# Altium PCB MS_1_MainBoard.PcbDoc
Units mm, origin at the board's own origin, x right, y up, seen from the top; angles counter-clockwise.
Board outline 92 x 68.8 mm, 2 copper layers (Top Layer, Bottom Layer), stack 1.621 mm thick; 80 components, 34 nets, 457 pads, 0 vias.
Unrouted connection lines stored in the file: 129.
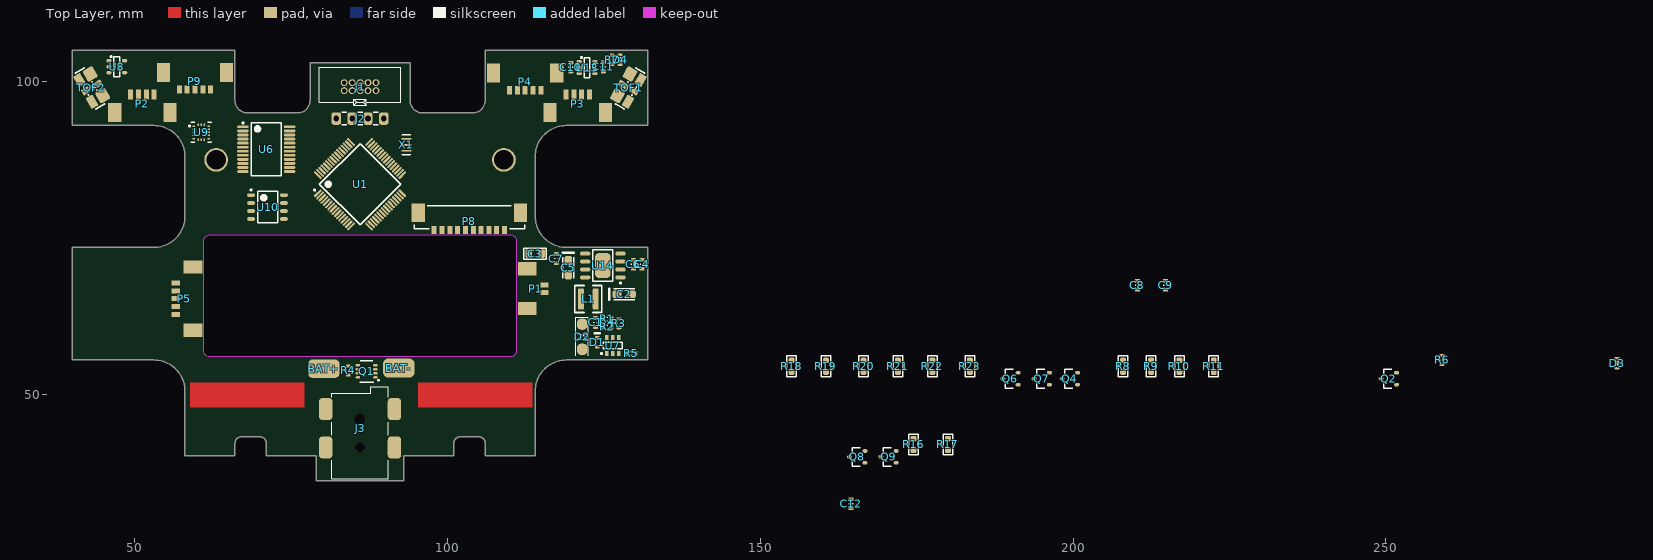
[diagram p0: Top Layer view]
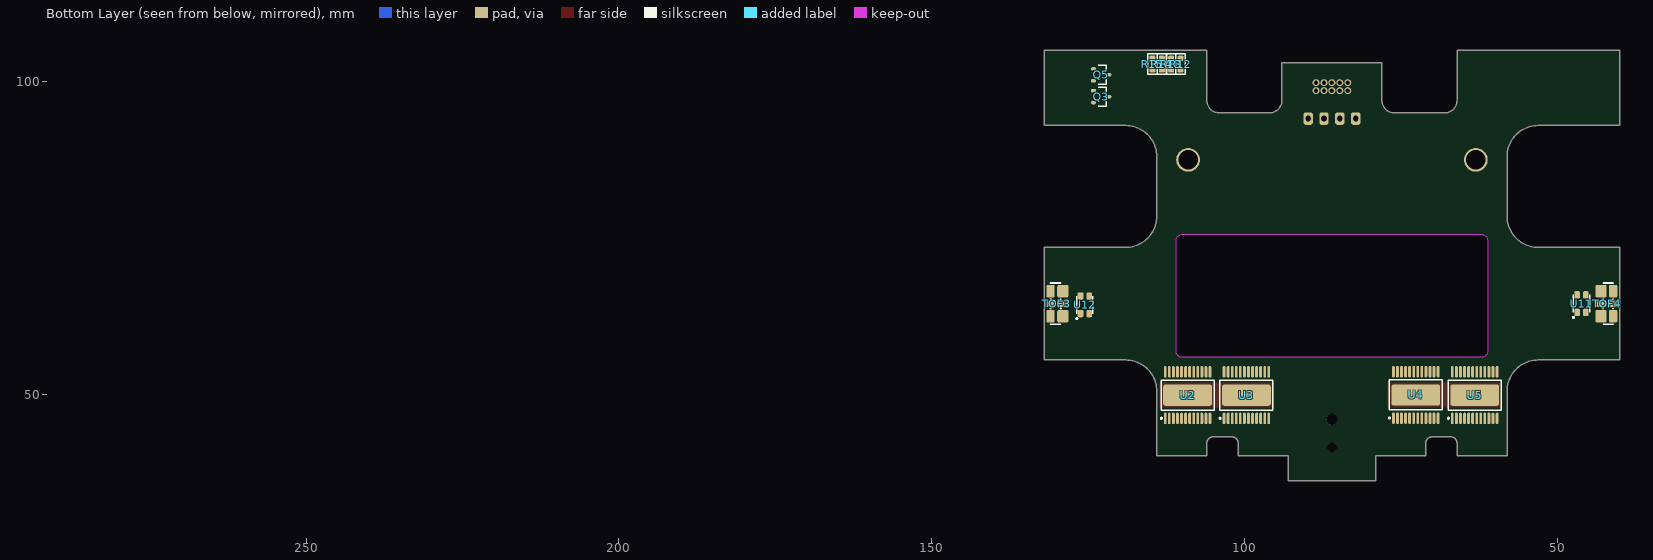
[diagram p1: Bottom Layer view, seen from below]

## Layer stack, top to bottom
Top Solder: solder mask 0.0102, Solder Resist, Dk 3.5
Top Layer: signal copper 0.0356
Dielectric 1: dielectric 1.55, FR-4, Dk 4.8
Bottom Layer: signal copper 0.0356
Bottom Solder: solder mask 0.0102, Solder Resist, Dk 3.5

## Board outline
40,55.5 53,55.5 cw(c53,50.5) 58,50.5 58,40.2 66,40.2 66,42.2 cw(c67,42.2) 67,43.2 70,43.2 cw(c70,42.2) 71,42.2 71,40.2 79,40.2 79,36.2 93,36.2 93,40.2 101,40.2 101,42.2 cw(c102,42.2) 102,43.2 105,43.2 cw(c105,42.2) 106,42.2 106,40.2 114,40.2 114,50.5 cw(c119,50.5) 119,55.5 132,55.5 132,73.5 119,73.5 cw(c119,78.5) 114,78.5 114,88 cw(c119,88) 119,93 132,93 132,105 106,105 106,97 cw(c104,97) 104,95 96,95 cw(c96,97) 94,97 94,103 78,103 78,97 cw(c76,97) 76,95 68,95 cw(c68,97) 66,97 66,105 40,105 40,93 53,93 cw(c53,88) 58,88 58,78.5 cw(c53,78.5) 53,73.5 40,73.5
cut-out: 62,75.5 110,75.5 cw(c110,74.5) 111,74.5 111,57 cw(c110,57) 110,56 62,56 cw(c62,57) 61,57 61,74.5 cw(c62,74.5)

## Design rules (kind name [scope] priority, off if disabled: settings)
BoardOutlineClearance [All] p1: gap=0.2 ignorepadtopadclearanceinfootprint=FALSE
Clearance Clearance_polygon [All vs InPolygon] p1: gap=0.4 ignorepadtopadclearanceinfootprint=FALSE
Clearance [All] p2: gap=0.155 ignorepadtopadclearanceinfootprint=FALSE
HoleSize [All] p1: absolutevalues=TRUE maxlimit=2.54 minlimit=0.3 maxpercent=80.000 minpercent=20.000
PasteMaskExpansion [All] p1: expansion=-0.05
PlaneClearance [All] p1: clearance=0.4
PlaneConnect [All] p1: pad.planeconnectstyle=Relief pad.reliefexpansion=0.508 pad.reliefentries=4 pad.reliefconductorwidth=0.254 pad.reliefairgap=0.155 via.planeconnectstyle=Direct via.reliefexpansion=0.508 via.reliefentries=4 via.reliefconductorwidth=0.254 via.reliefairgap=0.254
PolygonConnect [All] p1: thpad.connectstyle=Relief thpad.reliefconductorwidth=0.254 thpad.reliefentries=4 thpad.polygonreliefangle="90 Angle" thpad.airgapwidth=0.2 smdpad.connectstyle=Relief smdpad.reliefconductorwidth=0.254 smdpad.reliefentries=4 smdpad.polygonreliefangle="90 Angle" smdpad.airgapwidth=0.2 via.connectstyle=Direct via.reliefconductorwidth=0.254 via.reliefentries=4 via.polygonreliefangle="90 Angle" via.airgapwidth=0.254
RoutingVias [All] p1: holewidth=0.3 width=0.7 viastyle="Through Hole" minholewidth=0.3 minwidth=0.7 maxholewidth=0.5 maxwidth=1.1
RoutingVias RoutingVias_Power [InNetClass('Power')] p2: holewidth=0.4 width=0.8 viastyle="Through Hole" minholewidth=0.3 minwidth=0.7 maxholewidth=0.6 maxwidth=1.3
SolderMaskExpansion [All] p1: expansion=0.05
Width Width_Power [InNetClass('Power')] p1: maxlimit=1 minlimit=0.155 preferedwidth=0.4 minimp=50.000000 maximp=50.000000 favimp=50.000000
Width [All] p2: maxlimit=0.4 minlimit=0.155 preferedwidth=0.2 minimp=50.000000 maximp=50.000000 favimp=50.000000
26 further rules are at their usual default settings.

## Classes and differential pairs
component class Power: BAT+ BAT- C1 C2 C3 C4 C5 C6 C7 C12 D1 D2 L1 P1 Q1 R1 R2 R3 R4 R5 U7 U14
component class MotorsDrive: U2 U3 U4 U5
component class Main: J1 J2 J3 P2 P3 P4 P5 P8 P9 U1 U6 U9 U10 U11 U12 X1
component class Rangefinders: C8 C9 C10 C11 D3 D4 Q2 Q3 Q4 Q5 Q6 Q7 Q8 Q9 R6 R7 R8 R9 R10 R11 R12 R13 R14 R15 R16 R17 R18 R19 R20 R21 R22 R23 TOF1 TOF2 TOF3 TOF4 U8 U13

## Components (designator, comment, footprint, x,y, rotation, side; value= is the part's Value field where it differs from the comment)
BAT+ "1x2mm" "PAD 1x2mm" 80.2,54.1 r180 top value=NA
BAT- "1x2mm" "PAD 1x2mm" 92.2,54.2 r180 top value=NA
C1 "10n" C_0603_AUTO 123.65,61.5 r270 top
C2 "47uF 6.3V" Kemet_1206 125.85,65.1 r0 top
C3 "10u" C_0805_HAND 114,72.5 r180 top
C4 "1n" C_0603_AUTO 131.1,70.8 r90 top
C5 "47uF 6.3V" Kemet_1206 118.4,72.625 r270 top
C6 "100n" C_0603_AUTO 129.7,70.8 r90 top
C7 "100n" C_0603_AUTO 117.4,71.7 r90 top
C8 "100n" C_0603_AUTO 210.3,67.45 r90 top
C9 "100n" C_0603_AUTO 214.8,67.45 r90 top
C10 "100n" C_0603_AUTO 119.7,102.3 r90 top
C11 "100n" C_0603_AUTO 124.9,102.35 r90 top
C12 "10n" C_0603_AUTO 164.5,32.5 r90 top
D1 "1N4148WT-7" DIOD-SOD523-2_V 123.9,58.3 r90 top
D2 "STPS2L30A" SMA 121.52,56.2 r90 top value=NA
D3 "Red 0603" LED_0603_AUTO 286.999,55 r90 top value=Red
D4 "Red 0603" LED_0603_AUTO 127.6,103.5 r90 top value=Red
J1 "SHF-105-01-L-D-TH" SHF-105-01-L-D-TH 86,99.2 r0 top locked value=NA
J2 "Header 4x1" F_4X1_254 86,94.1 r90 top locked value=NA
J3 "694106106102" WE_694106106102 86,41.5 r90 top value=NA
L1 "4.7uH 5.1A" XAL4030 122.5,65.25 r0 top
P1 "53398-0271" MOLX-53398-0271_V 114.1,66.9 r270 top
P2 "53261-0471" MOLEX-53261-0471_V 51.2,96.5 r0 top
P3 "53261-0471" MOLEX-53261-0471_V 120.8,96.5 r0 top
P4 "53398-0571" MOLX-53398-0571-5_V 112.4,100 r180 top
P5 "53398-0571" MOLX-53398-0571-5_V 57.9,65.3 r90 top
P8 "53398-1071" MOLX-53398-1071_V 103.475,78.05 r0 top
P9 "53398-0571" MOLX-53398-0571-5_V 59.6,100.1 r180 top
Q1 "CSD16406Q3" SON8 87.05,53.675 r180 top value=NA
Q2 "2N7002BK" SOT23-3_AUTO 250.499,52.5 r90 top value=NA
Q3 "2N7002BK" SOT23-3_AUTO 122.9,97.6 r270 bottom value=NA
Q4 "2N7002BK" SOT23-3_AUTO 199.5,52.5 r90 top value=NA
Q5 "2N7002BK" SOT23-3_AUTO 122.9,101.1 r270 bottom value=NA
Q6 "2N7002BK" SOT23-3_AUTO 190,52.5 r90 top value=NA
Q7 "2N7002BK" SOT23-3_AUTO 195,52.5 r90 top value=NA
Q8 "2N7002BK" SOT23-3_AUTO 165.5,40 r90 top value=NA
Q9 "2N7002BK" SOT23-3_AUTO 170.5,40 r90 top value=NA
R1 "100k 1%" R_0603_AUTO 125.541,62.075 r0 top
R2 "47k 1%" R_0603_AUTO 125.541,60.775 r180 top
R3 "47k 1%" R_0603_AUTO 127.4,61.35 r90 top
R4 "100k 1%" R_0603_AUTO 84.1,53.825 r270 top
R5 "47k 1%" R_0603_AUTO 129.398,56.544 r180 top
R6 "680R 1%" R_0603_AUTO 258.999,55.5 r90 top
R7 "680R 1%" R_0603_AUTO 126.3,103.5 r270 top
R8 "2k2 1%" R_0603_HAND 208,54.5 r90 top
R9 "2k2 1%" R_0603_HAND 212.5,54.5 r90 top
R10 "47k 1%" R_0603_HAND 217,54.5 r90 top
R11 "47k 1%" R_0603_HAND 222.5,54.5 r90 top
R12 "2k2 1%" R_0603_HAND 110.2,102.8 r90 bottom
R13 "2k2 1%" R_0603_HAND 111.7,102.8 r90 bottom
R14 "47k 1%" R_0603_HAND 113.2,102.8 r90 bottom
R15 "47k 1%" R_0603_HAND 114.7,102.8 r90 bottom
R16 "2k2 1%" R_0603_HAND 174.5,42 r90 top
R17 "2k2 1%" R_0603_HAND 180,42 r90 top
R18 "47k 1%" R_0603_HAND 155,54.5 r90 top
R19 "47k 1%" R_0603_HAND 160.5,54.5 r90 top
R20 "2k2 1%" R_0603_HAND 166.5,54.5 r90 top
R21 "2k2 1%" R_0603_HAND 172,54.5 r90 top
R22 "47k 1%" R_0603_HAND 177.5,54.5 r90 top
R23 "47k 1%" R_0603_HAND 183.5,54.5 r90 top
TOF1 "VL53L0X carrier module" VL53L0X_module 129,99 r60 top locked value=NA
TOF2 "VL53L0X carrier module" VL53L0X_module 43,99 r300 top locked value=NA
TOF3 "VL53L0X carrier module" VL53L0X_module 130,64.5 r270 bottom locked value=NA
TOF4 "VL53L0X carrier module" VL53L0X_module 42,64.5 r90 bottom locked value=NA
U1 "STM32F722RET6" LQFP_64_HAND 86,83.6 r45 top value=NA
U2 "DRV8873S" SSOP24-TH_HAND 109.075,49.875 r90 bottom value=NA
U3 "DRV8873S" SSOP24-TH_HAND 99.675,49.875 r90 bottom value=NA
U4 "DRV8873S" SSOP24-TH_HAND 72.6,49.9 r90 bottom value=NA
U5 "DRV8873S" SSOP24-TH_HAND 63.175,49.875 r90 bottom value=NA
U6 "MCP23018-E/SS" SSOP-24_HAND 71,89.2 r0 top value=NA
U7 "LM2734YQMKE/NOPB" DDC0006A_L 126.4,57.8 r90 top
U8 "NCP114ASN280T1G" TSOP-5_AUTO 47.1,102.4 r0 top value=NA
U9 "LIS3DSH" LGA16_AUTO 60.6,91.9 r0 top value=NA
U10 "M24256-BRMN6" SOIC_8_AUTO 71.2,79.95 r0 top value=256kb
U11 "ASMB-MTB1-0A3A2" PLCC4 46.1,64.5 r180 bottom value=NA
U12 "ASMB-MTB1-0A3A2" PLCC4 125.506,64.325 r180 bottom value=NA
U13 "NCP114ASN280T1G" TSOP-5_AUTO 122.3,102.25 r0 top value=NA
U14 "ADP1706ARDZ-3.3-R7" SOIC-8_HAND_THERM 124.816,70.6 r180 top value=NA
X1 "CSTNE16M0V53C000R0" Murata_CSTCE 93.4,89.9 r90 top value=16MHz

## Footprints (in the part's own frame and the unit in brackets; to place one, negate y for a bottom-side part, rotate by r counter-clockwise, add the part's x,y. Pads: shape width x height; smd on the part's side, far side on the other; paste and mask are expansions set on the pad)
C_0603_AUTO [mm] "Metric_1608 Automatic soldering"
  rrect50% 0.6x0.8 smd: 1(-0.725,0) 2(0.725,0)
  silkscreen extent -0.05,-0.3 0.05,0.3, body extent -0.8,-0.43 0.8,0.43, height 0.6
C_0805_HAND [mm] "Metric_2012 Hand soldering"
  rrect50% 1.1x1.35 smd: 1(-1.025,0) 2(1.025,0)
  silkscreen extent -1.8,-0.9 1.8,0.9, body extent -1,-0.63 1,0.63, height 0.45
DDC0006A_L [mm] "SOT23, 6-Leads, Body 3.05x1.75mm, Pitch 0.95mm, IPC High Density"
  rrect18% 0.8x0.55 smd: 1(-1.275,0.95) 2(-1.275,0) 3(-1.275,-0.95) 4(1.275,-0.95) 5(1.275,0) 6(1.275,0.95)
  silkscreen extent -1.4,-1.55 0.5,1.9, body extent -1.43,-1.48 1.43,1.49, height 0.9
DIOD-SOD523-2_V [mm] "SOD523, 2-Leads, Body 1.2x0.8mm"
  rect 0.6x0.7 smd: 1(-0.7,0) 2(0.7,0)
  silkscreen extent 1.5,-0.4 1.5,0.4, body extent -0.8,-0.4 0.8,0.4, height 0.65
F_4X1_254 [mm] "Basic 4x1 female header"
  rrect50% 2x1.5 hole 0.9: 1(0,-3.81) 2(0,-1.27) 3(0,1.27) 4(0,3.81)
  silkscreen extent -1.02,-2.94 1.02,2.94, body extent -1.23,-5.08 1.27,5.08, height 8.4
Kemet_1206 [mm] "Tantalum Kemet 1206"
  rrect50% 1.45x1.15 smd: 1(1.225,0.9) 2(3.525,0.9)
  silkscreen extent 0,0 4.07,1.8, body extent 0.67,-0.01 4.07,1.79, height 1.78
LED_0603_AUTO [mm] "Cathode-1 Anode-2"
  rrect80% 0.4x0.8 smd: 1(-0.8,0) 2(0.8,0)
  silkscreen extent -0.3,-0.3 0.3,0.3, body extent -0.8,-0.4 0.8,0.4, height 0.7
LGA16_AUTO [mm] "pitch 0.5mm, 3x5 pins, body 3x3mm according to ST acc specs"
  oval 0.45x0.25 smd: 1(-1.2,1) 2(-1.2,0.5) 3(-1.2,0) 4(-1.2,-0.5) 5(-1.2,-1) 9(1.2,-1) 10(1.2,-0.5) 11(1.2,0) 12(1.2,0.5) 13(1.2,1)
  oval 0.25x0.45 smd: 6(-0.5,-1.2) 7(0,-1.2) 8(0.5,-1.2) 14(0.5,1.2) 15(0,1.2) 16(-0.5,1.2)
  silkscreen extent -2.02,-1.58 1.58,1.58, body extent -1.58,-1.58 1.58,1.58, height 1
LQFP_64_HAND [mm] "Hand soldering"
  rrect100% 1.6x0.35 smd: 1(-5.8,3.75) 2(-5.8,3.25) 3(-5.8,2.75) 4(-5.8,2.25) 5(-5.8,1.75) 6(-5.8,1.25) 7(-5.8,0.75) 8(-5.8,0.25) 9(-5.8,-0.25) 10(-5.8,-0.75) 11(-5.8,-1.25) 12(-5.8,-1.75) 13(-5.8,-2.25) 14(-5.8,-2.75) 15(-5.8,-3.25) 16(-5.8,-3.75) 33(5.8,-3.75) 34(5.8,-3.25) 35(5.8,-2.75) 36(5.8,-2.25) 37(5.8,-1.75) 38(5.8,-1.25) 39(5.8,-0.75) 40(5.8,-0.25) 41(5.8,0.25) 42(5.8,0.75) 43(5.8,1.25) 44(5.8,1.75) 45(5.8,2.25) 46(5.8,2.75) 47(5.8,3.25) 48(5.8,3.75)
  rrect100% 0.35x1.6 smd: 17(-3.75,-5.8) 18(-3.25,-5.8) 19(-2.75,-5.8) 20(-2.25,-5.8) 21(-1.75,-5.8) 22(-1.25,-5.8) 23(-0.75,-5.8) 24(-0.25,-5.8) 25(0.25,-5.8) 26(0.75,-5.8) 27(1.25,-5.8) 28(1.75,-5.8) 29(2.25,-5.8) 30(2.75,-5.8) 31(3.25,-5.8) 32(3.75,-5.8) 49(3.75,5.8) 50(3.25,5.8) 51(2.75,5.8) 52(2.25,5.8) 53(1.75,5.8) 54(1.25,5.8) 55(0.75,5.8) 56(0.25,5.8) 57(-0.25,5.8) 58(-0.75,5.8) 59(-1.25,5.8) 60(-1.75,5.8) 61(-2.25,5.8) 62(-2.75,5.8) 63(-3.25,5.8) 64(-3.75,5.8)
  silkscreen extent -5.92,-4.6 4.6,4.6, body extent -6,-6 6,6, height 1.6
MOLEX-53261-0471_V [mm] "SMD, 4-Leads, Body 10.15x5.2mm, Pitch 1.25mm"
  rect 0.8x1.6 smd: 1(-1.875,1.45) 2(-0.625,1.45) 3(0.625,1.45) 4(1.875,1.45)
  rect 2.1x3 smd: MP1(-4.425,-1.45) MP2(4.425,-1.45)
  body extent -5.08,-3.55 5.07,1.65, height 3.4
MOLX-53398-0271_V [mm] "Header, 2-Leads, Body 7.65x3.7mm, Pitch 1.25mm"
  rect 0.8x1.3 smd: 1(-0.625,1.375) 2(0.625,1.375)
  rect 2.1x3 smd: MP1(-3.175,-1.375) MP2(3.175,-1.375)
  body extent -3.82,-2.49 3.83,1.71, height 4.72
MOLX-53398-0571-5_V [mm] "CONN, 5-Leads, Body 11x4.2mm, Pitch 1.25mm"
  rect 0.8x1.3 smd: 1(-2.5,1.375) 2(-1.25,1.375) 3(0,1.375) 4(1.25,1.375) 5(2.5,1.375)
  rect 2.1x3 smd: MP1(-5.05,-1.375) MP2(5.05,-1.375)
  body extent -5.7,-2.75 5.7,1.45, height 4.7
MOLX-53398-1071_V [mm] "SMD, 10-Leads, Body 17.65x3.7mm, Pitch 1.25mm"
  rect 0.8x1.3 smd: 1(5.625,-1.75) 2(4.375,-1.75) 3(3.125,-1.75) 4(1.875,-1.75) 5(0.625,-1.75) 6(-0.625,-1.75) 7(-1.875,-1.75) 8(-3.125,-1.75) 9(-4.375,-1.75) 10(-5.625,-1.75)
  rect 2.1x3 smd: MP1(8.175,1) MP2(-8.175,1)
  silkscreen extent -8.82,-1.6 8.82,2.1, body extent -8.82,-2.1 8.83,2.1, height 4.77
Murata_CSTCE [mm] "Murata CSTCE resonator"
  rrect80% 0.3x1.6 smd: 1(-0.95,0) 2(0,0) 3(0.95,0)
  silkscreen extent -1.6,-0.65 1.6,0.65, body extent -1.6,-0.65 1.6,0.65, height 1.02
"PAD 1x2mm" [mm] "copper pad"
  rrect50% 5x3 smd: 1(0,0)
PLCC4 [mm]
  rrect50% 0.9x1.2 smd mask+0.05: 1(-0.7,-1.4) 2(-0.7,1.4) 3(0.7,1.4) 4(0.7,-1.4)
  silkscreen extent -1.43,-2.32 1.3,1.4, body extent -1.4,-1.75 1.4,1.75, height 1.95
R_0603_AUTO [mm] "Metric_1608 Automatic soldering"
  rrect50% 0.5x0.75 smd: 1(-0.725,0) 2(0.725,0)
  silkscreen extent -0.1,-0.28 0.1,0.28, body extent -0.8,-0.43 0.8,0.43, height 0.6
R_0603_HAND [mm] "Metric_1608 Hand soldering"
  rrect50% 0.9x0.95 smd: 1(-0.925,0) 2(0.925,0)
  silkscreen extent -1.65,-0.76 1.65,0.76, body extent -0.8,-0.43 0.8,0.43, height 0.6
SHF-105-01-L-D-TH [mm] "Samtec 2x5 pin 1.27mm connector"
  round 1.1 hole 0.7 mask+0.05: 1(-2.54,-0.635) 2(-2.54,0.635) 3(-1.27,-0.635) 4(-1.27,0.635) 5(0,-0.635) 6(0,0.635) 7(1.27,-0.635) 8(1.27,0.635) 9(2.54,-0.635) 10(2.54,0.635)
  silkscreen extent -6.5,-3 6.5,3.1, body extent -6.35,-2.5 6.35,3.09, height 5.33
SMA [mm] "standard SMA diode package"
  rrect80% 1.8x1.64 smd mask+0.05: 1(1,0) 2(5.03,0)
  silkscreen extent 0,-1 6.13,1, body extent 0.5,-1.35 5.5,1.35, height 2.15
SOIC-8_HAND_THERM [mm] "Hand soldering ; Package width = 3.9mm; Thermal pad"
  rrect100% 1.65x0.65 smd: 1(-2.825,1.905) 2(-2.825,0.635) 3(-2.825,-0.635) 4(-2.825,-1.905) 5(2.825,-1.905) 6(2.825,-0.635) 7(2.825,0.635) 8(2.825,1.905)
  rrect50% 2.5x4 smd: 9(0,0)
  silkscreen extent -2.95,-2.5 1.6,2.9, body extent -3,-2.5 3,2.5, height 1.75
SOIC_8_AUTO [mm] "Automatic soldering ; Package width = 3.9mm"
  oval 1.25x0.6 smd: 1(-2.625,1.905) 2(-2.625,0.635) 3(-2.625,-0.635) 4(-2.625,-1.905) 5(2.625,-1.905) 6(2.625,-0.635) 7(2.625,0.635) 8(2.625,1.905)
  silkscreen extent -2.75,-2.5 1.6,2.88, body extent -3,-2.5 3,2.5, height 1.75
SON8 [mm] "SON8_3x3mm_AUTO"
  rrect80% 0.7x0.4 smd: 1(-1.4,0.975) 2(-1.4,0.325) 3(-1.4,-0.325) 4(-1.4,-0.975) 5(1.4,-0.975) 6(1.4,-0.325) 7(1.4,0.325) 8(1.4,0.975)
  silkscreen extent -2,-1.7 1.1,1.7, body extent -1.68,-1.68 1.68,1.68, height 1
SOT23-3_AUTO [mm] "SOT23-3"
  rrect100% 0.6x0.8 smd: 1(-0.95,-1.225) 2(0.95,-1.225) 3(0,1.225)
  silkscreen extent -1.5,-0.47 1.5,0.83, body extent -1.5,-1.5 3.98,1.5, height 2.1
SSOP24-TH_HAND [mm] "HAND assembly SSOP-24 package, 0.65mm pitch, body 8.2x5.3"
  oval 1.85x0.45 smd: 1(-3.725,3.575) 2(-3.725,2.925) 3(-3.725,2.275) 4(-3.725,1.625) 5(-3.725,0.975) 6(-3.725,0.325) 7(-3.725,-0.325) 8(-3.725,-0.975) 9(-3.725,-1.625) 10(-3.725,-2.275) 11(-3.725,-2.925) 12(-3.725,-3.575) 13(3.725,-3.575) 14(3.725,-2.925) 15(3.725,-2.275) 16(3.725,-1.625) 17(3.725,-0.975) 18(3.725,-0.325) 19(3.725,0.325) 20(3.725,0.975) 21(3.725,1.625) 22(3.725,2.275) 23(3.725,2.925) 24(3.725,3.575)
  rrect20% 3.4x7.8 smd: 25(0,0)
  silkscreen extent -3.82,-4.25 2.4,4.33, body extent -3.9,-4.25 3.9,4.25, height 2
SSOP-24_HAND [mm] "HAND assembly SSOP-24 package, 0.65mm pitch, body 8.2x5.3"
  oval 1.85x0.45 smd: 1(-3.725,3.575) 2(-3.725,2.925) 3(-3.725,2.275) 4(-3.725,1.625) 5(-3.725,0.975) 6(-3.725,0.325) 7(-3.725,-0.325) 8(-3.725,-0.975) 9(-3.725,-1.625) 10(-3.725,-2.275) 11(-3.725,-2.925) 12(-3.725,-3.575) 13(3.725,-3.575) 14(3.725,-2.925) 15(3.725,-2.275) 16(3.725,-1.625) 17(3.725,-0.975) 18(3.725,-0.325) 19(3.725,0.325) 20(3.725,0.975) 21(3.725,1.625) 22(3.725,2.275) 23(3.725,2.925) 24(3.725,3.575)
  silkscreen extent -3.82,-4.25 2.4,4.32, body extent -3.9,-4.25 3.9,4.25, height 2
TSOP-5_AUTO [mm] "TSOP-5, 5-Leads, Pitch 0,95mm, IPC High Density_OnSemi-case483"
  rrect100% 0.85x0.55 smd: 1(-1.25,0.95) 2(-1.25,0) 3(-1.25,-0.95) 4(1.25,-0.95) 5(1.25,0.95)
  silkscreen extent -1.02,-1.6 0.45,1.72, body extent -1.5,-1.58 1.5,1.58, height 1.1
VL53L0X_module [mm] "Custom VL53L0X module"
  rrect30% 2x1.3 smd: 1(-2,-0.975) 3(2,-0.975)
  rrect30% 1x1.3 smd: 2(0,-0.975)
  rrect30% 2x1.8 smd: 4(2,0.975) 6(-2,0.975)
  rrect30% 1x1.8 smd: 5(0,0.975)
  silkscreen extent -3.3,-0.98 3.3,0.65, body extent -3.25,-2.02 3.25,1.33, height 5.5
WE_694106106102 [mm] "WE 694106106102 barell connector"
  rrect50% 3.5x2.15 smd: 1(0,5.5) 1(6.15,5.5) 2(0,-5.5) 3(6.15,-5.5)
  round 1.5 hole 1.6 unplated: MH1(0,0)
  round 1.7 hole 1.8 unplated: MH2(4.5,0)
  silkscreen extent -5,-4.5 9.7,4.5, body extent -5,-6.25 9.7,6.25, height 11.1
XAL4030 [mil] "CoilCraft XAL4030 package"
  rrect50% 38x135 smd: 1(-46.5,0) 2(46.5,0)
  silkscreen extent -85,-85 85,85, body extent -85,-85 85,85, height 122

## Part data
BAT+ BAT-: library part PAD_small, "copper pad", Manufacturer=NA, MPN=NA
C1 C3 C4 C6 C7 C8 C9 C10 C11 C12: library part Capacitor, Manufacturer=[Generic], MPN=[Generic]
C2 C5: library part T491A476M006AT, "Tantalum Surface Mount Capacitor, 47 uF, +/- 20%, 6.3 V, -55 to 125 degC, 2-Pin SMD, RoHS, Tape and Reel", Manufacturer=Kemet, Supplier Part Number 1=399-3700-2-ND, ComponentLink1Description=Datasheet, ComponentLink1URL=http://www.farnell.com/datasheets/2319567.pdf?_ga=2.178180387.727493313.1541494519-1704470397.1535652464&_gac=1.36309652.1541494519.EAIaIQobChMI6_a5xrK_3gIVxbUYCh3rMw6BEAAYAiAAEgJZGfD_BwE, MPN=T491A476M006AT, Supplier 1=Digi-Key, Supplier 2=Mouser, Supplier 3=Farnell, Supplier Part Number 2=80-T491A476M06, Supplier Part Number 3=1457429
D1: library part CMP-2000-05518-1, "Surface Mount Fast Switching Diode, -65 to 150 degC, 2-Pin SOD523, RoHS, Tape and Reel", Forward Current=250mA, Manufacturer="Diodes Inc", Package Description="2-Pin Small Outline Diode, Body 1.2 x 0.8 mm", Package Reference=SOD523-2, Package Type=SOD-523, PartNumber=1N4148WT, Datasheet URL=http://www.diodes.com/_files/datasheets/ds30396.pdf, Datasheet Version="Rev. 16-2, 11/2015", Diode Configuration=Single, Manufacturer URL=http://www.diodes.com/, Mounting Technology=SurfaceMount, Mounting Type=SurfaceMount, Number of Elements per Chip=1, Package URL=http://www.diodes.com/_files/packages/SOD523.pdf, Pin Count=2
D2: "Schottky Diodes & Rectifiers 2.0 Amp 30 Volt", Manufacturer=STMicroelectronics, Supplier Part Number 1=497-3759-2-ND, ComponentLink1Description=Datasheet, ComponentLink1URL=https://www.st.com/resource/en/datasheet/stps2l30.pdf, MPN=STPS2L30A, Supplier 1=Digi-Key, Supplier 2=Farnell, Supplier 3=Mouser, Supplier Part Number 2=1467552, Supplier Part Number 3=511-STPS2L30A
D3 D4: library part LED_Red_0603, "Generic Red 0603", Manufacturer=[Generic], MPN=[Generic]
J1: library part JTAG_ARM_MINI_10_PIN, "Standard ARM 20 pin JTAG connector. Angle 90 deg.", Manufacturer=Samtec, Supplier Part Number 1=2308450, MPN=SHF-105-01-L-D-TH, Supplier 1=Farnell, Supplier 2=Mouser, Supplier 3=Digi-Key, Supplier Part Number 2=200-SHF10501LDTH, Supplier Part Number 3=SHF-105-01-L-D-TH-ND
J2: Manufacturer=NA, MPN=NA
J3: "DC Power Jack Connector with 4 soldering pads & Pegs WR-DC, Male, Right Angled, SMT, 5 A, 24 V", Manufacturer="Wurth Elektronik", Supplier Part Number 1=732-5929-1-ND, MPN=694106106102, Supplier 1=Digi-Key, Supplier 2=Farnell, Supplier 3=Mouser, Supplier Part Number 2=2472148, Supplier Part Number 3=710-694106106102
L1: library part XAL4030-472, "Fixed Inductor 4.7uH 20% 5.1A 44.1mOhms", Manufacturer=Coilcraft, MPN=XAL4030-472
P1: library part CMP-2000-07600-1, "Male Header, Pitch 1.25 mm, 1 x 2 Position, Height 4.7 mm, -40 to 85 degC, RoHS, Tape and Reel", Colour=Natural, Contact Resistance=20mOhm, Current Rating=1A, Flammability Rating=UL94V-0, Insulation Resistance=100MOhm, Manufacturer=Molex, Max Operating Temperature=85degC, Min Operating Temperature=-40degC, Package Description="Male Header, Pitch 1.25 mm, 1 x 2 Position, Height 4.7 mm", Package Quantity=1000, Voltage Rating=125V, Contact Material=Tin, Contact Plating=Tin, Datasheet URL=http://www.molex.com/pdm_docs/sd/533980271_sd.pdf, Datasheet Version="Rev. J, 09/2015", Gender=Male, Glow Wire Compliant=Non-compliant, Housing Colour=Natural, Housing Material=Nylon, Lead Free=LeadFree, Manufacturer URL=http://www.molex.com/, Mount=SurfaceMount, Mounting Technology=SurfaceMount, Number of Circuits=2, Number of Contacts=2, Number of Positions=2, Number of Rows=1, Orientation=Vertical, Package Reference=53398-0271, Packaging=TapeandReel, Pitch=1.25mm, Radiation Hardening=No, REACH SVHC=Unknown, RoHSCompliant=True, Termination=Solder, Voltage Rating (AC)=125V, Voltage Rating (DC)=125V, Working Voltage=125V
P2 P3: library part CMP-2000-05238-1, "Male Header, Pitch 1.25 mm, 1 x 4 Position, Height 3.4 mm, -40 to 85 degC, RoHS, Tape and Reel", Current Rating=1A, Manufacturer=Molex, Package Description="1.25mm Pitch PicoBlade(TM) Header, Surface Mount, Right Angle, Lead-Free, 4 Circuits", Voltage Rating=125V, =0532610471, Brand=Molex, Contact Material=PhosphorBronze, Contact Plating=Tin, Datasheet URL=http://www.molex.com/pdm_docs/sd/532610471_sd.pdf, Datasheet Version="Rev. G, 01/2012", Factory Pack Quantity=1000, Housing Material=Thermoplastic, Manufacturer URL=http://www.molex.com/, Mounting Angle=Right, Mounting Style=SMD/SMT, Number of Positions=4, Number of Positions / Contacts=4, Number of Rows=1, Packaging=Reel, Pitch=1.25mm, Product Category=Headers&WireHousings, Product Type=Headers, RoHS=Details, Series=53261, Termination Style=SMD, Tradename=PicoBlade, Type=Shrouded
P4 P5 P9: library part CMP-2000-05250-1, "Male Header, Pitch 1.25 mm, 1 x 5 Postion, Height 4.7 mm, -40 to 85 degC, RoHS, Tape and Reel", Current Rating=1A, Manufacturer=Molex, Package Reference=MOLX-53398-0571-5, Voltage Rating=125V, =0533980571, Brand=Molex, Contact Gender=Pin(Male), Contact Material=PhosphorBronze, Contact Plating=Tin, Datasheet URL=http://www.molex.com/pdm_docs/sd/533980571_sd.pdf, Datasheet Version="Rev. E, 04/2006", Factory Pack Quantity=1000, Housing Material=Nylon, Manufacturer URL=http://www.molex.com/, Mounting Angle=Vertical, Mounting Style=SMD, Number of Positions=5Position, Number of Rows=1Row, Packaging=Reel, Pitch=1.25mm, Product=Headers, Product Category=Headers&WireHousings, RoHS=Details, Series=53398, Termination Style=SMD, Tradename=PicoBlade, Type=Shrouded
P8: library part CMP-2000-05635-1, "Male Header, Pitch 1.25 mm, 1 x 10 Position, Height 4.7 mm, -40 to 85 degC, RoHS, Tape and Reel", Current Rating=1A, Manufacturer=Molex, Package Description="Male Header, Pitch 1.25 mm, 1 x 10 Position, Height 4.7 mm", Voltage Rating=125V, =0533981071, Brand=Molex, Contact Gender=Pin(Male), Contact Material=PhosphorBronze, Contact Plating=Tin, Datasheet URL=http://www.molex.com/pdm_docs/sd/533981071_sd.pdf, Datasheet Version="Rev. J, 09/2015", Factory Pack Quantity=1000, Housing Material=Nylon, Manufacturer URL=http://www.molex.com/, Mounting Angle=Vertical, Mounting Style=SMD, Mounting Technology=SurfaceMount, Number of Positions=10Position, Number of Rows=1Row, Package Reference=53398-1071, Packaging=Reel, Pitch=1.25mm, Product=Headers, Product Category=Headers&WireHousings, RoHS=Details, Series=53398, Termination Style=SMD, Tradename=PicoBlade, Type=Shrouded
Q1: "N-Channel NexFET™ Power MOSFET", Manufacturer="Texas Instruments", Supplier Part Number 1=296-24251-2-ND, ComponentLink1Description=Datasheet, ComponentLink1URL=http://www.ti.com/lit/ds/symlink/csd16406q3.pdf, MPN=CSD16406Q3, Supplier 1=Digi-Key, Supplier 2=Mouser, Supplier 3=Farnell, Supplier Part Number 2=595-CSD16406Q3, Supplier Part Number 3=2458618
Q2 Q3 Q4 Q5 Q6 Q7 Q8 Q9: "60 V, 350 mA N-channel Trench MOSFET Vth=1.6V", Manufacturer=Nexperia, Supplier Part Number 1=771-2N7002BK215, ComponentLink1Description=Datasheet, ComponentLink1URL=https://assets.nexperia.com/documents/data-sheet/2N7002BK.pdf, MPN=2N7002BK, Supplier 1=Mouser, Supplier 2=Digi-Key, Supplier Part Number 2=1727-4789-2-ND
R1 R2 R3 R4 R5 R6 R7 R8 R9 R10 R11 R12 R13 R14 R15 R16 R17 R18 R19 R20 R21 R22 R23: library part Resistor, Manufacturer=[Generic], MPN=[Generic]
TOF1 TOF2 TOF3 TOF4: library part VL53L0X_module, "Custom VL53L0X sensor carrier module", Manufacturer=NA, ComponentLink1Description="Sensor Datasheet", ComponentLink1URL=https://www.st.com/resource/en/datasheet/vl53l0x.pdf, ComponentLink2Description="Sensor product page", ComponentLink2URL=https://www.st.com/en/imaging-and-photonics-solutions/vl53l0x.html, MPN=NA
U1: "ST 32-bit MCU, 64-pin package", Manufacturer=STMicroelectronics, Supplier Part Number 1=2725144, ComponentLink1Description=Datasheet, ComponentLink1URL=https://www.st.com/resource/en/datasheet/stm32f722re.pdf, ComponentLink4Description="Product page", ComponentLink4URL=https://www.st.com/en/microcontrollers/stm32f722re.html, MPN=STM32F722RET6, Supplier 1=Farnell, Supplier 2=Mouser, Supplier 3=Digi-Key, Supplier Part Number 2=511-STM32F722RET6, Supplier Part Number 3=497-17184-ND
U2 U3 U4 U5: "10A H-Bridge Motor Driver with Integrated Current Sensing and Current Sense Output", Manufacturer="Texas Instruments", Supplier Part Number 1=296-50275-6-ND, ComponentLink1Description=Datasheet, ComponentLink1URL=http://www.ti.com/lit/ds/symlink/drv8873.pdf, ComponentLink2Description="Product page", ComponentLink2URL=http://www.ti.com/product/DRV8873, MPN=DRV8873S, Supplier 1=Digi-Key, Supplier 2=Mouser, Supplier Part Number 2=595-DRV8873SPWPRQ1
U6: "Expander I/O, 16-bit, 3.4 MHz, I2C, 1.8 V, 5.5 V, SSOP24", Manufacturer=Microchip, ComponentLink1Description=Datasheet, ComponentLink1URL=http://ww1.microchip.com/downloads/en/DeviceDoc/22103a.pdf, ComponentLink2Description="Product page", ComponentLink2URL=https://www.microchip.com/wwwproducts/en/MCP23018, MPN=MCP23018-E/SS
U7: library part CMP-0063-01059-3, "1A Load Step-Down DC-DC Regulator, 6-pin Tiny SOT23, Pb-Free", Manufacturer="Texas Instruments", PackageTopMarking=SVCB*XTT, PowerWise=N, Code_IPC=SOT26A-6, Code_JEDEC=MO-193-AA, ComponentLink1Description="Datasheet URL", ComponentLink1URL=http://www.ti.com/general/docs/lit/getliterature.tsp?genericPartNumber=LM2734-Q1&fileType=pdf, CompType=MiscPower, PackageDescription="Molded TSOT, 2.97 x 1.65 x 0.87mm Body, 6 Lead, 0.95mm Pitch", PackageReference=DDC0006A, PinCount=6, RoHS=Y
U8 U13: "LDO fixed 2V8 low noise", Manufacturer="ON Semi", Supplier Part Number 1=NCP114ASN280T1GOSDKR-ND, ComponentLink1Description=Datasheet, ComponentLink1URL=http://www.onsemi.com/pub/Collateral/NCP114-D.PDF, MPN=NCP114ASN280T1G, Supplier 1=Digi-Key, Supplier 2=Farnell, Supplier 3=Mouser, Supplier Part Number 2=2677149, Supplier Part Number 3=863-NCP114ASN280T1G
U9: "MEMS digital output motion sensor: /  ultra-low-power high-performance three-axis \"nano\" accelerometer", Manufacturer=STMicroelectronics, Supplier Part Number 1=2433078, ComponentLink1Description=Datasheet, ComponentLink1URL=https://www.st.com/resource/en/datasheet/lis3dsh.pdf, MPN=LIS3DSH, Supplier 1=Farnell, Supplier 2=Digi-Key, Supplier 3=Mouser, Supplier Part Number 2=LIS3DSH-ND, Supplier Part Number 3=511-LIS3DSH
U10: "256 Kbit Serial I2C Bus EEPROM", Manufacturer=STMicroelectronics, Supplier Part Number 1=3130145RL, ComponentLink1Description=Datasheet, ComponentLink1URL=https://www.st.com/resource/en/datasheet/m24256-br.pdf, MPN=M24256-BRMN6, Supplier 1=Farnell, Supplier 2=Digi-Key, Supplier 3=Mouser, Supplier Part Number 2=497-6348-2-ND, Supplier Part Number 3=511-M24256-BRMN6TP
U11 U12: "LED RGB DIFFUSED 4PLCC SMD", Manufacturer="Broadcom Limited", Supplier Part Number 1=2401106RL, ComponentLink1Description="Product page", ComponentLink1URL=https://www.broadcom.com/products/leds-and-displays/surface-mount-plcc/plcc-4-leds/multi-color/asmb-mtb1-0a3a2#overview, MPN=ASMB-MTB1-0A3A2, Supplier 1=Farnell, Supplier 2=Mouser, Supplier 3=Digi-Key, Supplier Part Number 2=630-ASMB-MTB1-0A3A2, Supplier Part Number 3=516-3280-6-ND
U14: "LDO 3V3 1A Slow-Start, 450uV RMS noise", Manufacturer="Analog Devices", Supplier Part Number 1=2727463, ComponentLink1Description=Datasheet, ComponentLink1URL=https://www.analog.com/media/en/technical-documentation/data-sheets/ADP1706_1707_1708.pdf, MPN=ADP1706ARDZ-3.3-R7, Supplier 1=Farnell, Supplier 2=Digi-Key, Supplier 3=Mouser, Supplier Part Number 2=ADP1706ARDZ-3.3-R7TR-ND, Supplier Part Number 3=584-ADP1706ARDZ3.3R7
X1: "16MHz crystal resonator", Manufacturer=Murata, Supplier Part Number 1=81-CSTNE16M0V53C000R, ComponentLink1Description=Datasheet, ComponentLink1URL=https://www.murata.com/en-global/products/productdata/8801162166302/SPEC-CSTNE16M0V53C000R0.pdf?1559743213000, MPN=CSTNE16M0V53C000R0, Supplier 1=Mouser, Supplier 2=Digi-Key, Supplier Part Number 2=490-17949-2-ND

## Free pads (board coordinates)
  round 3.8 hole 3.1 unplated: HOLE1(63,87.5) HOLE2(109,87.5)

## Nets (pads, with @x,y where several pads share a name; then routed paths per layer and width w, separated by ;. In a path a pad name is that pad's centre, name@x,y a point inside that pad or via, vN(x,y) a via of type N, cw(c..) or ccw(c..) an arc to the next point about the centre after c; other vN are vias at no path point)
2V8_L: C9.2 D3.2 Q2.1 Q4.1 Q6.1 Q8.1 R8.2 R9.2 R10.2 R11.2 R16.2 R17.2 R18.2 R19.2 TOF2.1 TOF4.1 U8.5
2V8_R: C11.2 D4.2 Q3.1 Q5.1 Q7.1 Q9.1 R12.2 R13.2 R14.2 R15.2 R20.2 R21.2 R22.2 R23.2 TOF1.1 TOF3.1 U13.5
3V3: C5.1 C7.2 C8.2 C10.2 U8.1 U8.3 U13.1 U13.3 U14.5 U14.6 U14.7
5V: C2.1 C4.2 C6.2 D1.2 L1.2 R3.2 U14.1 U14.3 U14.4
"BATTERY -": BAT-.1 Q1.1 Q1.2 Q1.3 R4.1
BATTERY+: BAT+.1 C3.2 P1.1 R2.2 U7.5
GND: C2.2 C3.1 C5.2 C6.1 C7.1 C8.1 C9.1 C10.1 C11.1 C12.1 D2.1 Q1.5 Q1.6 Q1.7 Q1.8 R5.1 R6.1 R7.1 TOF1.6 TOF2.6 TOF3.6 TOF4.6 U7.2 U8.2 U13.2 U14.2 U14.9
NetC1_1: C1.1 D2.2 L1.1 U7.6
NetC1_2: C1.2 D1.1 U7.1
NetC4_1: C4.1 R3.1 R5.2 U7.3
NetC12_2: C12.2 U14.8
NetD3_1: D3.1 R6.2
NetD4_1: D4.1 R7.2
NetP1_2: P1.2 R1.2
NetQ1_4: Q1.4 R1.1 R4.2
NetQ2_2: Q2.2 R8.1 TOF2.2
NetQ3_2: Q3.2 R12.1 TOF1.2
NetQ4_2: Q4.2 R9.1 TOF2.3
NetQ5_2: Q5.2 R13.1 TOF1.3
NetQ6_2: Q6.2 R16.1 TOF4.2
NetQ7_2: Q7.2 R20.1 TOF3.2
NetQ8_2: Q8.2 R17.1 TOF4.3
NetQ9_2: Q9.2 R21.1 TOF3.3
NetR2_1: R2.1 U7.4
NetR10_1: R10.1 TOF2.4
NetR11_1: R11.1 TOF2.5
NetR14_1: R14.1 TOF1.4
NetR15_1: R15.1 TOF1.5
NetR18_1: R18.1 TOF4.4
NetR19_1: R19.1 TOF4.5
NetR22_1: R22.1 TOF3.4
NetR23_1: R23.1 TOF3.5
SCL: Q2.3 Q3.3 Q6.3 Q7.3
SDA: Q4.3 Q5.3 Q8.3 Q9.3
pads on no net: J1.1 J1.2 J1.3 J1.4 J1.5 J1.6 J1.7 J1.8 J1.9 J1.10 J2.1 J2.2 J2.3 J2.4 J3.1 J3.2 J3.3 J3.MH1 J3.MH2 P1.MP1 P1.MP2 P2.1 P2.2 P2.3 P2.4 P2.MP1 P2.MP2 P3.1 P3.2 P3.3 P3.4 P3.MP1 P3.MP2 P4.1 P4.2 P4.3 P4.4 P4.5 P4.MP1 P4.MP2 P5.1 P5.2 P5.3 P5.4 P5.5 P5.MP1 P5.MP2 P8.1 P8.2 P8.3 P8.4 P8.5 P8.6 P8.7 P8.8 P8.9 P8.10 P8.MP1 P8.MP2 P9.1 P9.2 P9.3 P9.4 P9.5 P9.MP1 P9.MP2 U1.1 U1.2 U1.3 U1.4 U1.5 U1.6 U1.7 U1.8 U1.9 U1.10 U1.11 U1.12 U1.13 U1.14 U1.15 U1.16 U1.17 U1.18 U1.19 U1.20 U1.21 U1.22 U1.23 U1.24 U1.25 U1.26 U1.27 U1.28 U1.29 U1.30 U1.31 U1.32 U1.33 U1.34 U1.35 U1.36 U1.37 U1.38 U1.39 U1.40 U1.41 U1.42 U1.43 U1.44 U1.45 U1.46 U1.47 U1.48 U1.49 U1.50 U1.51 U1.52 U1.53 U1.54 U1.55 U1.56 U1.57 U1.58 U1.59 U1.60 U1.61 U1.62 U1.63 U1.64 U2.1 U2.2 U2.3 U2.4 U2.5 U2.6 U2.7 U2.8 U2.9 U2.10 U2.11 U2.12 U2.13 U2.14 U2.15 U2.16 U2.17 U2.18 U2.19 U2.20 U2.21 U2.22 U2.23 U2.24 U2.25 U3.1 U3.2 U3.3 U3.4 U3.5 U3.6 U3.7 U3.8 U3.9 U3.10 U3.11 U3.12 U3.13 U3.14 U3.15 U3.16 U3.17 U3.18 U3.19 U3.20 U3.21 U3.22 U3.23 U3.24 U3.25 U4.1 U4.2 U4.3 U4.4 U4.5 U4.6 U4.7 U4.8 U4.9 U4.10 U4.11 U4.12 U4.13 U4.14 U4.15 U4.16 U4.17 U4.18 U4.19 U4.20 U4.21 U4.22 U4.23 U4.24 U4.25 U5.1 U5.2 U5.3 U5.4 U5.5 U5.6 U5.7 U5.8 U5.9 U5.10 U5.11 U5.12 U5.13 U5.14 U5.15 U5.16 U5.17 U5.18 U5.19 U5.20 U5.21 U5.22 U5.23 U5.24 U5.25 U6.1 U6.2 U6.3 U6.4 U6.5 U6.6 U6.7 U6.8 U6.9 U6.10 U6.11 U6.12 U6.13 U6.14 U6.15 U6.16 U6.17 U6.18 U6.19 U6.20 U6.21 U6.22 U6.23 U6.24 U8.4 U9.1 U9.2 U9.3 U9.4 U9.5 U9.6 U9.7 U9.8 U9.9 U9.10 U9.11 U9.12 U9.13 U9.14 U9.15 U9.16 U10.1 U10.2 U10.3 U10.4 U10.5 U10.6 U10.7 U10.8 U11.1 U11.2 U11.3 U11.4 U12.1 U12.2 U12.3 U12.4 U13.4 X1.1 X1.2 X1.3

## Other copper
Top Layer:
  rectangle net GND: 95.3,47.9 113.6,51.9
  rectangle net GND: 58.8,47.9 77.1,51.9

## Silkscreen, mask and mechanical layers (free items; w line width, h text height)
Outline:
  lines w0.1: 40,55.5 53,55.5 cw(c53,50.5) 58,50.5 58,40.2 66,40.2 66,42.2 cw(c67,42.2) 67,43.2 70,43.2 cw(c70,42.2) 71,42.2 71,40.2 79,40.2 79,36.2 93,36.2 93,40.2 101,40.2 101,42.2 cw(c102,42.2) 102,43.2 105,43.2 cw(c105,42.2) 106,42.2 106,40.2 114,40.2 114,50.5 cw(c119,50.5) 119,55.5 132,55.5 132,73.5 119,73.5 cw(c119,78.5) 114,78.5 114,88 cw(c119,88) 119,93 132,93 132,105 106,105 106,97 cw(c104,97) 104,95 96,95 cw(c96,97) 94,97 94,103 78,103 78,97 cw(c76,97) 76,95 68,95 cw(c68,97) 66,97 66,105 40,105 40,93 53,93 cw(c53,88) 58,88 58,78.5 cw(c53,78.5) 53,73.5 40,73.5 40,55.5 ; 61,57 ccw(c62,57) 62,56 110,56 ccw(c110,57) 111,57 111,74.5 ccw(c110,74.5) 110,75.5 62,75.5 ccw(c62,74.5) 61,74.5 61,57

## Dimensions
58,40.2 to 40,105 on Doc_top
40,105 to 132,105 on Doc_top